# EAGLE board FlightControl (EAGLE 6.5.0)
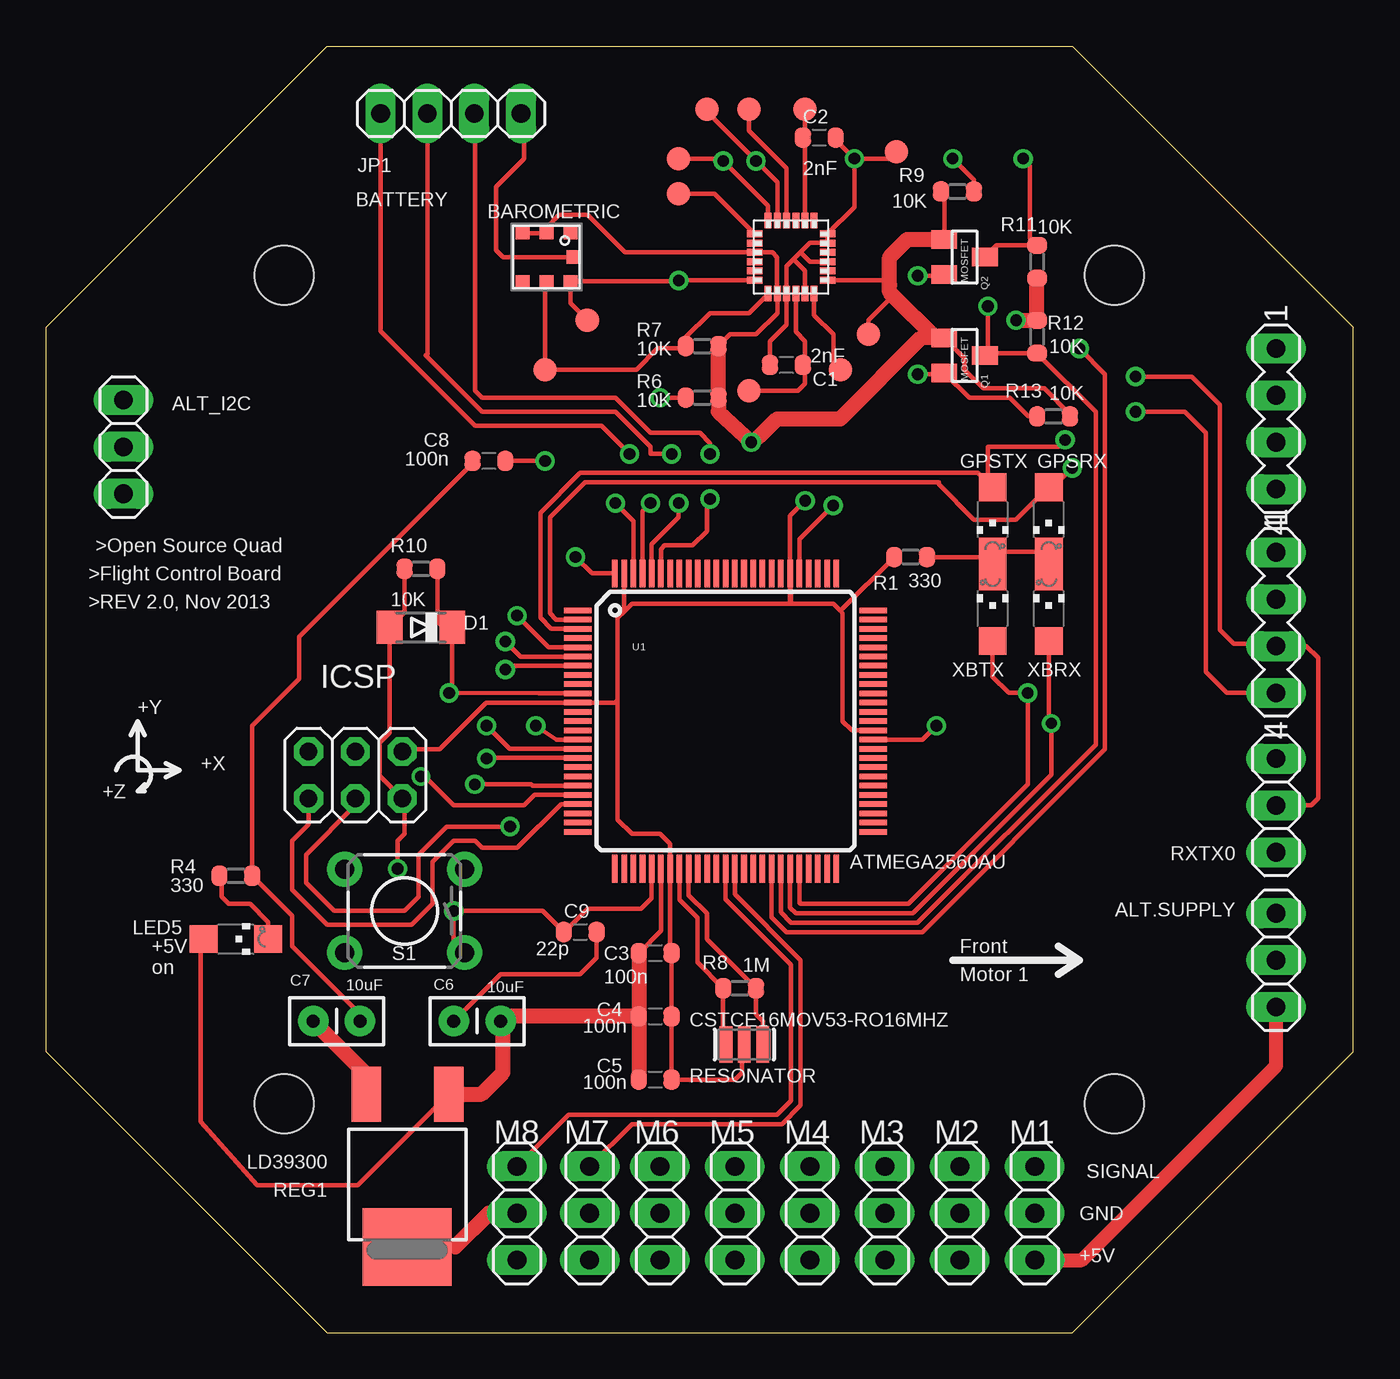
[diagram p0: board, top side]
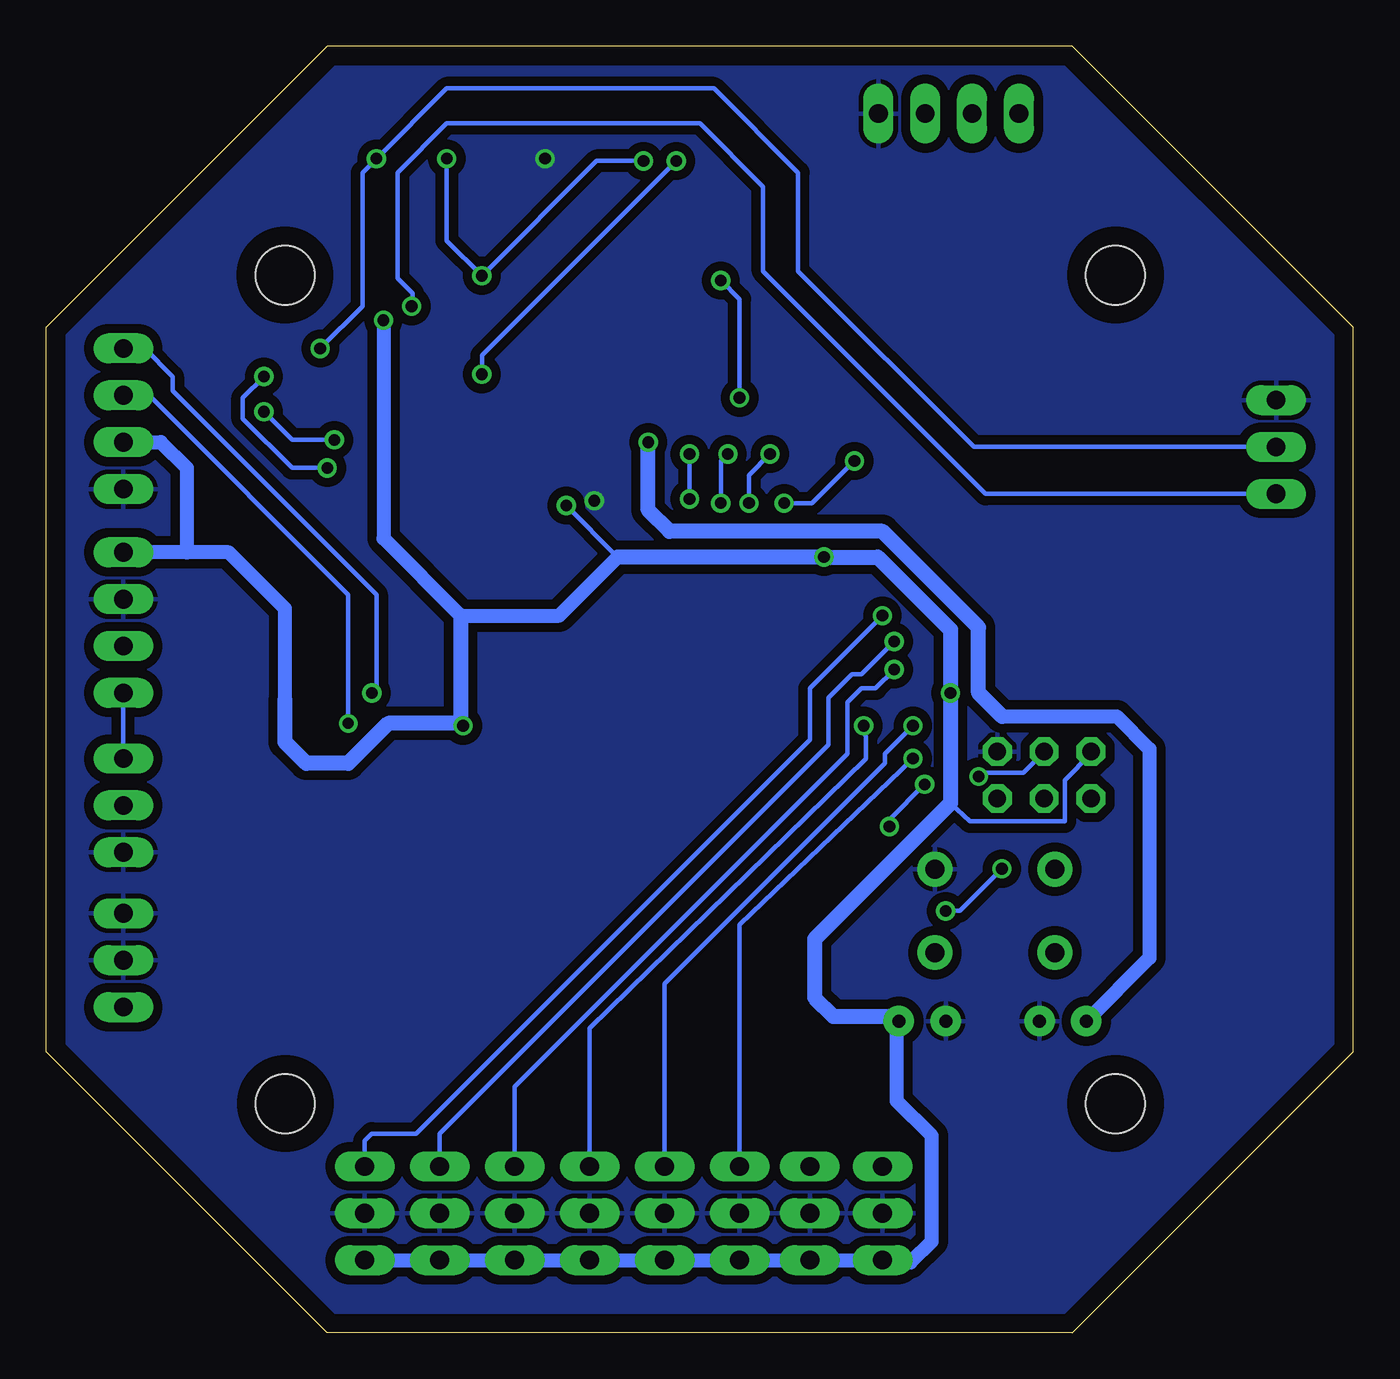
[diagram p1: board, bottom side, seen from below]

Size 70.87 x 69.72 mm. Coordinates in mm from the lower left corner, seen from the top.
Outline: 0,15.24 0,54.48 15.24,69.72 55.63,69.72 70.87,54.48 70.87,15.24 55.63,0 15.24,0 0,15.24
Copper layers (1*16): Top 0.035mm / dielectric 1.5mm / Bottom 0.035mm
Design rules "FlightControl *": minimum track width 10mil, minimum drill 24mil, track to track 7mil, track to pad 7mil, pad to pad 7mil, via to via 7mil, smd to smd 0mil, copper to edge 40mil, drill to drill 8mil, minimum pad ring 12mil, minimum via ring 8mil, stop-mask expansion 4mil, vias tented up to drill 25mil, thermal gap 10mil
Net classes: 0 default: clearance 0.205 mm
Holes 3.2 mm at 57.9,12.41 12.9,12.41 12.9,57.31 57.91,57.32

## Footprints (pad centres in the part's own frame; a part is rotated, then mirrored left to right if it is on the bottom)
1X03 = drill 1.016 long: 1 -2.54,0; 2 0,0; 3 2.54,0
7LGA = smd 0.75 x 0.65: 1 1.5,1.3; 2 0.2,1.3; 3 -1.1,1.3; 4 -1.1,-1.3; 5 0.2,-1.3; 6 1.5,-1.3 | smd 0.65 x 0.75: 7 1.6,0
1X04 = drill 1.016 long: 1 -3.81,0; 2 -1.27,0; 3 1.27,0; 4 3.81,0
C0603-ROUND = smd 0.898 x 1.1: 1 -0.889,0; 2 0.889,0
CAP-PTH-SMALLEZ = drill 0.7 pad 1.651: 1 0,0; 2 2.54,0
RESONATOR = smd 0.7 x 2: 1 -1,0; 2 0,0; 3 1,0
MINIMELF = smd 1.4 x 1.8: A 1.7,0; C -1.7,0
CHIPLED_1206 = smd 1.5 x 1.5: A 0,-1.75; C 0,1.75
2X03 = drill 0.95 pad 1.55 octagon: 1 -2.54,-1.27; 2 -2.54,1.27; 3 0,-1.27; 4 0,1.27; 5 2.54,-1.27; 6 2.54,1.27
QFN.24.4X4 = smd 0.85 x 0.38: 1 -1.975,1.25; 2 -1.975,0.75; 3 -1.975,0.25; 4 -1.975,-0.25; 5 -1.975,-0.75; 6 -1.975,-1.25; 13 1.975,-1.25; 14 1.975,-0.75; 15 1.975,-0.25; 16 1.975,0.25; 17 1.975,0.75; 18 1.975,1.25 | smd 0.38 x 0.85: 7 -1.25,-1.975; 8 -0.75,-1.975; 9 -0.25,-1.975; 10 0.25,-1.975; 11 0.75,-1.975; 12 1.25,-1.975; 19 1.25,1.975; 20 0.75,1.975; 21 0.25,1.975; 22 -0.25,1.975; 23 -0.75,1.975; 24 -1.25,1.975
SOT23 = smd 1 x 1.4: 1 -0.95,-1.1; 2 0.95,-1.1; 3 0,1.1
R0603-ROUND = smd 0.898 x 1.1: 1 -0.889,0; 2 0.889,0
DPAK = smd 1.6 x 2.997: 1 -2.261,-4.928; 3 2.21,-4.928 | smd 4.826 x 4.191: 4 0,3.353
TACTILE-PTH = drill 1.016 pad 1.88: 1 -3.251,2.261; 2 3.251,2.261; 3 -3.251,-2.261; 4 3.251,-2.261
MA04-1 = drill 1.016 long: 1 -3.81,0; 2 -1.27,0; 3 1.27,0; 4 3.81,0
PAD.03X.05 = smd 1.27 x 1.27: P$1 0,0
TQFP100 = smd 1.5 x 0.3: 1 -8,6; 2 -8,5.5; 3 -8,5; 4 -8,4.5; 5 -8,4; 6 -8,3.5; 7 -8,3; 8 -8,2.5; 9 -8,2; 10 -8,1.5; 11 -8,1; 12 -8,0.5; 13 -8,0; 14 -8,-0.5; 15 -8,-1; 16 -8,-1.5; 17 -8,-2; 18 -8,-2.5; 19 -8,-3; 20 -8,-3.5; 21 -8,-4; 22 -8,-4.5; 23 -8,-5; 24 -8,-5.5; 25 -8,-6; 51 8,-6; 52 8,-5.5; 53 8,-5; 54 8,-4.5; 55 8,-4; 56 8,-3.5; 57 8,-3; 58 8,-2.5; 59 8,-2; 60 8,-1.5; 61 8,-1; 62 8,-0.5; 63 8,0; 64 8,0.5; 65 8,1; 66 8,1.5; 67 8,2; 68 8,2.5; 69 8,3; 70 8,3.5; 71 8,4; 72 8,4.5; 73 8,5; 74 8,5.5; 75 8,6 | smd 0.3 x 1.5: 26 -6,-8; 27 -5.5,-8; 28 -5,-8; 29 -4.5,-8; 30 -4,-8; 31 -3.5,-8; 32 -3,-8; 33 -2.5,-8; 34 -2,-8; 35 -1.5,-8; 36 -1,-8; 37 -0.5,-8; 38 0,-8; 39 0.5,-8; 40 1,-8; 41 1.5,-8; 42 2,-8; 43 2.5,-8; 44 3,-8; 45 3.5,-8; 46 4,-8; 47 4.5,-8; 48 5,-8; 49 5.5,-8; 50 6,-8; 76 6,8; 77 5.5,8; 78 5,8; 79 4.5,8; 80 4,8; 81 3.5,8; 82 3,8; 83 2.5,8; 84 2,8; 85 1.5,8; 86 1,8; 87 0.5,8; 88 0,8; 89 -0.5,8; 90 -1,8; 91 -1.5,8; 92 -2,8; 93 -2.5,8; 94 -3,8; 95 -3.5,8; 96 -4,8; 97 -4.5,8; 98 -5,8; 99 -5.5,8; 100 -6,8

## Placement (x,y rotation side)
ALT.SUPPLY  [1X03]  66.67,20.19 90 top
ALT_I2C  [1X03]  4.19,48.01 90 top
BAROMETRIC  BMP085  [7LGA]  26.92,58.29 0 top
BATTERY  JP1  [1X04]  21.94,66.07 0 top
C1  2nF  [C0603-ROUND]  40.13,52.45 180 top
C2  2nF  [C0603-ROUND]  41.91,64.77 0 top
C3  100n  [C0603-ROUND]  33.02,20.57 0 top
C4  100n  [C0603-ROUND]  33.02,17.14 0 top
C5  100n  [C0603-ROUND]  33.02,13.72 0 top
C6  10uF  [CAP-PTH-SMALLEZ]  24.64,16.89 180 top
C7  10uF  [CAP-PTH-SMALLEZ]  14.48,16.89 0 top
C8  100n  [C0603-ROUND]  24,47.24 180 top
C9  22p  [C0603-ROUND]  28.96,21.72 0 top
CSTCE16MOV53-RO16MHZ  RESONATOR  [RESONATOR]  37.85,15.62 0 top
D1  [MINIMELF]  20.32,38.23 180 top
GPSRX  [CHIPLED_1206]  54.36,44.07 180 top
GPSTX  [CHIPLED_1206]  51.31,44.07 180 top
ICSP  [2X03]  16.76,30.23 0 top
LED5  [CHIPLED_1206]  10.29,21.34 270 top
M1  [1X03]  53.59,6.48 90 top
M2  [1X03]  49.53,6.48 90 top
M3  [1X03]  45.47,6.48 90 top
M4  [1X03]  41.4,6.48 90 top
M5  [1X03]  37.34,6.48 90 top
M6  [1X03]  33.27,6.48 90 top
M7  [1X03]  29.46,6.48 90 top
M8  [1X03]  25.53,6.48 90 top
MPU-9150  MPU-9150.QFN  [QFN.24.4X4]  40.39,58.29 0 top
Q1  MOSFET  [SOT23]  49.78,52.96 270 top
Q2  MOSFET  [SOT23]  49.78,58.29 270 top
R1  330  [R0603-ROUND]  46.86,42.04 0 top
R4  330  [R0603-ROUND]  10.29,24.77 180 top
R6  10K  [R0603-ROUND]  35.56,50.67 0 top
R7  10K  [R0603-ROUND]  35.56,53.47 0 top
R8  1M  [R0603-ROUND]  37.59,18.67 180 top
R9  10K  [R0603-ROUND]  49.4,61.85 0 top
R10  10K  [R0603-ROUND]  20.32,41.4 0 top
R11  10K  [R0603-ROUND]  53.72,58.04 90 top
R12  10K  [R0603-ROUND]  53.72,53.98 90 top
R13  10K  [R0603-ROUND]  54.61,49.66 180 top
REG1  LD39300  [DPAK]  19.56,8 180 top
RXTX0  [1X03]  66.67,28.58 270 top
S1  SWITCH-MOMENTARY-2PTH  [TACTILE-PTH]  19.43,22.86 180 top
SV1  GPS  [MA04-1]  66.67,38.48 270 top
TP1  TEST-POINT3X5  [PAD.03X.05]  38.1,51.05 0 top
TP2  TEST-POINT3X5  [PAD.03X.05]  41.15,66.29 0 top
TP3  TEST-POINT3X5  [PAD.03X.05]  29.34,54.86 0 top
TP4  TEST-POINT3X5  [PAD.03X.05]  38.1,66.29 0 top
TP5  TEST-POINT3X5  [PAD.03X.05]  34.29,63.63 0 top
TP6  TEST-POINT3X5  [PAD.03X.05]  35.81,66.29 0 top
TP7  TEST-POINT3X5  [PAD.03X.05]  34.29,61.72 0 top
TP8  TEST-POINT3X5  [PAD.03X.05]  27.05,52.2 0 top
TP9  TEST-POINT3X5  [PAD.03X.05]  44.58,54.1 0 top
TP10  TEST-POINT3X5  [PAD.03X.05]  46.1,64.01 0 top
TP11  TEST-POINT3X5  [PAD.03X.05]  43.05,52.2 0 top
U1  ATMEGA2560AU  [TQFP100]  36.83,33.15 0 top
XB  XB  [MA04-1]  66.67,49.53 270 top
XBRX  [CHIPLED_1206]  54.36,39.24 0 top
XBTX  [CHIPLED_1206]  51.31,39.24 0 top

## Library data of the parts
ALT.SUPPLY ALT_I2C BATTERY M1-M8 RXTX0 = pinhead
BAROMETRIC = MyLibrary
C1-C5 C8 C9 CSTCE16MOV53-RO16MHZ ICSP R1 R4 R6-R13 = SmartPrj
C6 C7 = SparkFun-Capacitors
D1 = diode
GPSRX GPSTX LED5 XBRX XBTX = adafruit
MPU-9150 = invensense
Q1 Q2 = SparkFun-DiscreteSemi; PROD_ID: TRANS-00830
REG1 = v-reg
S1 = SparkFun-Electromechanical
SV1 XB = con-lstb; OC_FARNELL: unknown; OC_NEWARK: unknown
TP1-TP11 = SparkFun-Passives
U1 = SparkFun-DigitalIC

## Nets
+3V3: BAROMETRIC.2 BAROMETRIC.3 C7.1 MPU-9150.3 MPU-9150.8 MPU-9150.13 Q1.1 Q2.1 R6.2 R7.2 R9.1 R13.1 REG1.3 TP9.P$1
+5V: ALT.SUPPLY.1 C3.1 C4.1 C5.1 C6.1 D1.C ICSP.2 LED5.A M1.1 M2.1 M3.1 M4.1 M5.1 M6.1 M7.1 M8.1 R10.2 R11.1 R12.2 REG1.1 SV1.1 U1.10 U1.31 U1.61 U1.80 U1.100 XB.3
AREF: C8.1 U1.98
AUXSCL: BAROMETRIC.5 MPU-9150.7 R7.1 TP8.P$1
AUXSDA: BAROMETRIC.6 MPU-9150.6 R6.1 TP3.P$1
CELL1: BATTERY.1 U1.97
CELL2: BATTERY.2 U1.96
CELL3: BATTERY.3 U1.95
CPOUT: C2.1 MPU-9150.20 TP2.P$1
GND: ALT.SUPPLY.2 ALT.SUPPLY.3 ALT_I2C.3 BAROMETRIC.7 BATTERY.4 C1.2 C2.2 C3.2 C4.2 C5.2 C6.2 C7.2 C8.2 C9.2 CSTCE16MOV53-RO16MHZ.2 ICSP.6 M1.2 M2.2 M3.2 M4.2 M5.2 M6.2 M7.2 M8.2 MPU-9150.9 MPU-9150.11 MPU-9150.15 MPU-9150.17 MPU-9150.18 R1.1 R4.1 REG1.4 RXTX0.3 S1.3 SV1.2 TP10.P$1 U1.11 U1.32 U1.62 U1.81 U1.99 XB.4
GPS_RX: GPSRX.A RXTX0.2 SV1.3 U1.2
GPS_TX: GPSTX.A RXTX0.1 SV1.4 U1.3
MISO: ICSP.1 U1.22
MOSI: ICSP.4 U1.21
N$7: LED5.C R4.2
N$8: MPU-9150.1 TP7.P$1
N$9: MPU-9150.22 TP4.P$1
N$10: MPU-9150.12 TP11.P$1
PWM1: M1.3 U1.5
PWM2: M2.3 U1.6
PWM3: M3.3 U1.7
PWM4: M4.3 U1.15
PWM5: M5.3 U1.16
PWM6: M6.3 U1.17
PWM7: M7.3 U1.39
PWM8: M8.3 U1.38
R_LED: GPSRX.C GPSTX.C R1.2 XBRX.C XBTX.C
REGOUT: C1.1 MPU-9150.10 TP1.P$1
RESET: C9.1 D1.A ICSP.5 R10.1 S1.1 U1.30
SCK: ICSP.3 U1.20
SCL3V3: MPU-9150.23 Q2.2 R9.2 TP6.P$1
SCL5V: ALT_I2C.2 Q2.3 R11.2 U1.43
SDA3V3: MPU-9150.24 Q1.2 R13.2 TP5.P$1
SDA5V: ALT_I2C.1 Q1.3 R12.1 U1.44
XB_RX: U1.45 XB.2 XBRX.A
XB_TX: U1.46 XB.1 XBTX.A
XTAL1: CSTCE16MOV53-RO16MHZ.3 R8.1 U1.34
XTAL2: CSTCE16MOV53-RO16MHZ.1 R8.2 U1.33

## Tracks (layer width: path | path; a pad name or v marks a point on that pad's centre or on a via)
+3V3  (via drill 0.64)
  Top 0.254: Q1.1 49.78,52.81 49.78,52.2 50.8,51.18 54.1,51.18 55.5,49.78 R13.1 | R7.2 37.08,54.1 38.48,54.1 39.64,55.26 MPU-9150.8 39.62,56.33 39.62,58.29 39.37,58.54 MPU-9150.3 31.37,58.54 29.34,60.58 27.81,60.58 27.12,59.89 BAROMETRIC.2 BAROMETRIC.3 | 48.5,59.05 Q2.1 48.68,61.68 R9.1 | REG1.3 17.35,14.02 | MPU-9150.13 45.45,57.04 45.72,56.77 | TP9.P$1 44.58,54.86 45.91,56.2
  Top 0.813: R7.2 R6.2 36.45,49.91 v38.23,48.26 38.73,48.64 39.62,49.53 43.05,49.53 47.43,53.91 Q1.1 48.2,53.91 45.91,56.2 45.72,56.39 45.72,56.77 45.72,58.29 46.67,59.24 Q2.1 | 17.35,14.02 C7.1
  Bottom 0.762: C7.1 11.05,20.32 11.05,31.62 12.83,33.4 19.05,33.4
  Bottom 0.813: 19.05,33.4 20.32,34.67 20.32,38.23 25.53,43.43 37.08,43.43 38.23,44.58 v38.23,48.26
+5V  (via drill 0.64)
  Top 0.254: U1.61 47.51,32.15 v48.26,32.89 | U1.80 40.83,42.99 v42.67,44.83 | 30.83,41.18 U1.100 29.59,41.15 v28.7,42.04 | U1.10 26.69,34.65 v21.84,34.67 22.02,34.85 22.02,37.72 | U1.31 33.33,21.77 C3.1 | 24.89,17.14 C6.1 | REG1.1 16.89,8 11.43,8 8.38,11.43 8.38,21.34 | D1.C 22.02,37.72 | R10.2 21.21,38.53 22.02,37.72 | 66.67,17.78 ALT.SUPPLY.1
  Top 0.762: LED5.A 8.38,21.34 | M1.1 56.13,3.94 66.67,14.48 66.67,17.78
  Top 0.813: C3.1 C4.1 | C4.1 C5.1 | R11.1 R12.2 v52.58,54.86 | C4.1 24.89,17.14 | REG1.1 23.6,12.93 24.77,14.1 24.77,16.76 C6.1
  Bottom 0.254: 24.89,17.14 C6.1 | 52.58,54.74 v52.58,54.86 | ICSP.2 14.22,31.37 15.65,29.95 15.65,27.71 20.78,27.71 21.84,28.7 | 39.88,42.04 v42.67,44.83
  Bottom 0.762: 24.77,16.76 24.77,12.57 22.86,10.67 22.86,4.95 24,3.81 25.4,3.81 M8.1 M7.1 M6.1 M5.1 M4.1 M3.1 M2.1 M1.1 | 52.58,54.74 52.58,43.05 48.39,38.86 43.05,38.86 39.88,42.04 | 57.91,34.29 57.91,39.24 60.96,42.29 63.25,42.29 | 63.25,42.29 SV1.1 | XB.3 64.64,48.26 63.25,46.86 63.25,42.29
  Bottom 0.813: C6.1 24.77,16.76 | 24.89,17.14 28.19,17.14 29.21,18.16 29.21,21.34 21.84,28.7 v21.84,34.67 21.84,38.1 25.78,42.04 v28.7,42.04 39.88,42.04 | 48.39,38.86 48.39,33.02 | 48.39,33.02 v48.26,32.89 | 48.39,33.02 52.32,33.02 54.48,30.86 56.77,30.86 57.91,32 57.91,34.29
AREF  (via drill 0.64)
  Top 0.254: U1.98 31.83,43.99 v30.86,44.96 | C8.1 v27.05,47.24
  Bottom 0.254: v30.86,44.96 29.34,44.96 v27.05,47.24
AUXSCL
  Top 0.254: 34.46,53.47 R7.1 | MPU-9150.7 38.88,56.03 38.1,55.24 35.98,55.24 34.67,53.94 R7.1 | BAROMETRIC.5 27.12,56.84 27.05,56.77 TP8.P$1 32,52.2 33.15,53.34 34.54,53.34 R7.1
AUXSDA  (via drill 0.64)
  Top 0.254: R6.1 v33.27,50.67 | MPU-9150.6 34.31,57.04 v34.29,57.02 34.26,56.99 BAROMETRIC.6 28.42,55.78 TP3.P$1
  Bottom 0.254: v33.27,50.67 33.27,56.01 v34.29,57.02
CELL1  (via drill 0.64)
  Top 0.254: v32.77,44.96 32.33,44.52 U1.97 | BATTERY.1 18.13,54.26 23.24,49.15 30.1,49.15 v31.62,47.62
  Bottom 0.254: v31.62,47.62 32.77,46.48 v32.77,44.96
CELL2  (via drill 0.64)
  Top 0.254: U1.96 32.83,42.74 34.29,44.2 v34.29,44.96 | v33.91,47.62 32.77,47.62 32.77,48.01 30.86,49.91 23.62,49.91 20.57,52.96 20.67,53.05 BATTERY.2
  Bottom 0.254: v33.91,47.62 34.29,47.24 v34.29,44.96
CELL3  (via drill 0.64)
  Top 0.254: U1.95 33.33,41.33 33.33,42.47 33.53,42.67 35.05,42.67 35.81,43.43 35.81,45.01 v35.99,45.19 | 23.37,65.91 BATTERY.3 23.24,66.04 23.24,51.05 23.62,50.67 30.86,50.67 32.77,48.77 35.43,48.77 35.99,48.21 v35.99,47.62
  Bottom 0.254: v35.99,47.62 v35.99,45.19
CPOUT
  Top 0.254: MPU-9150.20 41.14,64.65 C2.1 41.15,64.9 TP2.P$1
GND  (via drill 0.64)
  Top 0.254: 41.15,56.31 MPU-9150.11 41.14,57.54 40.51,58.17 | U1.99 31.33,39.08 | 31.33,39.08 30.99,38.73 30.99,34.29 | 30.99,34.29 30.99,27.81 31.75,27.05 33.27,27.05 33.82,26.51 33.82,25.16 U1.32 33.83,20.65 C3.2 C4.2 C5.2 37.34,13.72 37.72,14.1 37.72,15.49 CSTCE16MOV53-RO16MHZ.2 | U1.62 43.68,32.65 43.18,33.15 43.18,38.99 43.05,39.12 | 43.05,39.12 42.67,39.5 40.39,39.5 | 40.39,39.5 40.39,39.75 U1.81 | U1.81 40.33,39.55 40.39,39.5 | 40.39,39.5 31.75,39.5 31.33,39.08 | U1.81 40.33,44.27 v41.15,45.09 | R1.1 43.05,39.12 | REG1.4 22.17,4.65 | 24,6.48 M8.2 | C9.2 29.84,20.32 28.96,19.43 24.64,19.43 C6.2 | ICSP.6 19.43,31.62 21.34,31.62 23.86,34.15 U1.11 30.84,34.15 30.99,34.29 | BAROMETRIC.7 24.77,58.29 24.38,58.67 24.38,62.1 25.91,63.63 25.91,65.91 BATTERY.4 | TP10.P$1 45.72,63.63 v43.81,63.63 | C2.2 42.8,64.64 v43.81,63.63 | v43.81,63.63 43.81,61 MPU-9150.18 MPU-9150.17 42.35,59.05 41.4,59.05 40.89,58.55 | C7.2 17.02,17.27 13.34,20.95 13.34,22.61 R4.1 11.18,32.89 13.72,35.43 13.72,37.72 23.11,47.12 C8.2 | C1.2 39.24,53.72 40.14,54.61 MPU-9150.9 40.14,57.79 40.51,58.17 | 40.51,58.17 40.89,58.55 | MPU-9150.15 41.4,58.04 40.89,58.55
  Top 0.813: 22.17,4.65 24,6.48
  Bottom 0.254: 32.31,6.54 32.31,6.58 M6.2
  pour Bottom (isolate 0.5): 0.51,0.76 70.36,0.38 70.36,69.21 0.89,69.21
GPS_RX  (via drill 0.64)
  Top 0.254: U1.2 27.65,38.65 27.3,38.99 27.3,44.2 29.21,46.1 48.39,46.1 48.39,45.97 50.29,44.07 52.58,44.07 54.33,45.82 GPSRX.A 54.58,45.82 v55.63,46.86 | RXTX0.2 68.58,28.58 68.96,28.96 68.96,36.58 68.33,37.21 SV1.3 66.55,37.34 64.39,37.34 63.63,38.1 63.63,50.29 62.1,51.82 v59.05,51.82
  Bottom 0.254: v55.63,46.86 57.53,46.86 60.2,49.53 60.2,50.67 v59.05,51.82
GPS_TX  (via drill 0.64)
  Top 0.254: U1.3 27.39,38.15 26.8,38.73 26.8,44.45 28.96,46.61 50.52,46.61 GPSTX.A 51.05,46.07 51.05,48.01 54.86,48.01 v55.24,48.39 | SV1.4 64.01,34.67 62.87,35.81 62.87,48.77 61.72,49.91 v59.05,49.91
  Bottom 0.254: RXTX0.1 SV1.4 | v55.24,48.39 57.53,48.39 v59.05,49.91
MISO
  Top 0.254: ICSP.1 14.22,27.56 13.34,26.67 13.34,24 15.24,22.1 19.81,22.1 20.95,23.24 20.95,25.53 22.1,26.67 23.24,26.67 23.62,26.29 25.53,26.29 27.9,28.65 28.85,28.65 U1.22
MOSI  (via drill 0.61)
  Top 0.254: 28.65,29.13 U1.21 26.48,29.15 25.91,28.58 22.1,28.58 20.52,30.15 v20.32,30.15
  Bottom 0.254: v20.32,30.15 20.12,30.35 17.88,30.35 16.87,31.37 ICSP.4
N$7
  Top 0.254: LED5.C 12.04,22.25 11.05,23.24 9.91,23.24 9.53,23.62 9.53,24.64 R4.2
N$8
  Top 0.254: TP7.P$1 36.23,61.72 MPU-9150.1
N$9
  Top 0.254: TP4.P$1 38.1,65.15 40.14,63.12 MPU-9150.22
N$10
  Top 0.254: MPU-9150.12 41.64,55.14 42.67,54.1 42.67,52.58 TP11.P$1
PWM1  (via drill 0.64)
  Top 0.254: U1.5 27.24,37.15 v25.53,38.86
  Bottom 0.254: M1.3 53.59,10.41 53.21,10.79 50.8,10.79 29.46,32.13 29.46,34.93 v25.53,38.86
PWM2  (via drill 0.64)
  Top 0.254: U1.6 25.71,36.65 v24.89,37.47
  Bottom 0.254: M2.3 49.53,10.79 28.45,31.88 28.45,34.42 27.18,35.69 26.67,35.69 v24.89,37.47
PWM3  (via drill 0.64)
  Top 0.254: U1.7 25.1,36.15 v24.89,35.94
  Bottom 0.254: M3.3 45.47,13.33 27.43,31.37 27.43,34.16 26.67,34.93 25.91,34.93 v24.89,35.94
PWM4  (via drill 0.64)
  Top 0.254: U1.15 27.67,32.15 v26.54,32.89
  Bottom 0.254: M4.3 41.4,16.51 26.42,31.12 26.42,32.26 v26.54,32.89
PWM5  (via drill 0.64)
  Top 0.254: U1.16 25.12,31.65 v23.88,32.89
  Bottom 0.254: M5.3 37.34,18.92 25.4,30.86 25.4,31.37 v23.88,32.89
PWM6  (via drill 0.64)
  Top 0.254: U1.17 23.91,31.15 v23.88,31.12
  Bottom 0.254: M6.3 33.27,22.1 v23.88,31.12
PWM7
  Top 0.254: U1.39 37.33,23.76 40.89,20.19 40.89,12.32 39.88,11.3 31.75,11.3 M7.3
PWM8
  Top 0.254: U1.38 36.83,23.49 40.39,19.94 40.39,12.57 39.62,11.81 28.32,11.81 M8.3
R_LED
  Top 0.254: XBRX.C GPSRX.C GPSTX.C | GPSTX.C 50.7,42.32 | GPSTX.C XBTX.C | R1.2 51.03,42.04 GPSTX.C
REGOUT
  Top 0.254: TP1.P$1 40.77,51.05 41.15,51.44 41.15,52.32 C1.1 41.15,52.58 41.15,53.72 40.64,54.23 MPU-9150.10
RESET  (via drill 0.64)
  Top 0.254: U1.30 32.83,23.56 32.26,22.99 29.34,22.99 C9.1 26.92,22.86 v22.1,22.86 22.1,21.18 S1.1 | v19.05,25.15 19.05,26.67 19.43,27.05 19.43,28.83 ICSP.5 18.09,30.18 18.09,31.98 18.62,32.51 D1.A 19.43,39.04 R10.1
  Bottom 0.254: v22.1,22.86 21.34,22.86 v19.05,25.15
SCK  (via drill 0.64)
  Top 0.254: ICSP.3 16.76,28.58 14.1,25.91 14.1,24.38 15.62,22.86 19.43,22.86 20.19,23.62 20.19,25.91 21.72,27.43 v25.15,27.43 | v23.24,29.72 26.29,29.72 26.36,29.65 U1.20
  Bottom 0.254: v25.15,27.43 25.15,27.81 v23.24,29.72
SCL3V3  (via drill 0.64)
  Top 0.254: MPU-9150.23 39.64,62.35 v38.48,63.5 35.69,66.29 TP6.P$1 | Q2.2 48.62,57.28 v47.24,57.28 | R9.2 50.29,62.48 v49.15,63.63
  Bottom 0.254: v49.15,63.63 49.15,59.18 v47.24,57.28 41.02,63.5 v38.48,63.5
SCL5V  (via drill 0.64)
  Top 0.254: U1.43 39.33,22.52 40.13,21.72 47.5,21.72 57.4,31.62 57.4,51.94 v56.01,53.34 | Q2.3 51.52,58.93 R11.2 53.34,59.31 53.34,63.25 v52.96,63.63
  Bottom 0.254: ALT_I2C.2 20.57,48.01 30.1,57.53 30.1,62.87 34.67,67.44 49.15,67.44 v52.96,63.63 53.72,62.87 53.72,55.63 v56.01,53.34
SDA3V3  (via drill 0.64)
  Top 0.254: MPU-9150.24 39.14,61.07 v36.7,63.5 36.58,63.63 TP5.P$1 | v47.24,51.94 48.62,51.94 Q1.2 48.7,52.01 50.04,50.67 52.24,50.67 53.25,49.66 R13.2
  Bottom 0.254: v47.24,51.94 47.24,52.96 v36.7,63.5
SDA5V  (via drill 0.64)
  Top 0.254: U1.44 39.83,22.78 40.39,22.23 47.24,22.23 56.9,31.88 56.9,49.91 R12.1 51.01,53.09 Q1.3 51.05,53.13 v51.05,55.63
  Bottom 0.254: ALT_I2C.1 19.94,45.47 32,57.53 32,62.1 35.43,65.53 49.15,65.53 51.82,62.87 51.82,57.15 51.01,56.35 51.01,55.67 v51.05,55.63
XB_RX  (via drill 0.6)
  Top 0.254: U1.45 40.33,23.04 40.64,22.73 46.99,22.73 54.48,30.23 v54.48,33.02 54.36,33.15 XBRX.A
  Bottom 0.254: XB.2 65.28,50.8 54.48,40.01 v54.48,33.02
XB_TX  (via drill 0.64)
  Top 0.254: U1.46 40.83,23.3 40.89,23.24 46.74,23.24 53.21,29.72 v53.21,34.67 52.2,34.67 51.31,35.56 XBTX.A
  Bottom 0.254: XB.1 65.53,53.34 64.01,51.82 64.01,51.05 52.96,40.01 52.96,34.93 v53.21,34.67
XTAL1
  Top 0.254: U1.34 34.83,23.72 35.81,22.73 35.81,21.34 R8.1 38.48,17.27 38.86,16.89 38.86,15.64 CSTCE16MOV53-RO16MHZ.3
XTAL2
  Top 0.254: U1.33 34.33,23.45 35.31,22.48 35.31,20.07 R8.2 36.7,15.76 CSTCE16MOV53-RO16MHZ.1

## Text on the board
tPlace: >Open Source Quad | >Flight Control Board | >REV 2.0, Nov 2013 | +Y | +X | +Z | Front | +5V / on | Motor 1 | SIGNAL | GND | +5V